# Altium PCB IMU.PcbDoc
Units mm, origin at the board's own origin, x right, y up, seen from the top; angles counter-clockwise.
Board outline 102.89 x 32.03 mm, 2 copper layers (Top Layer, Bottom Layer); 5 components, 20 nets, 80 pads, 25 vias.
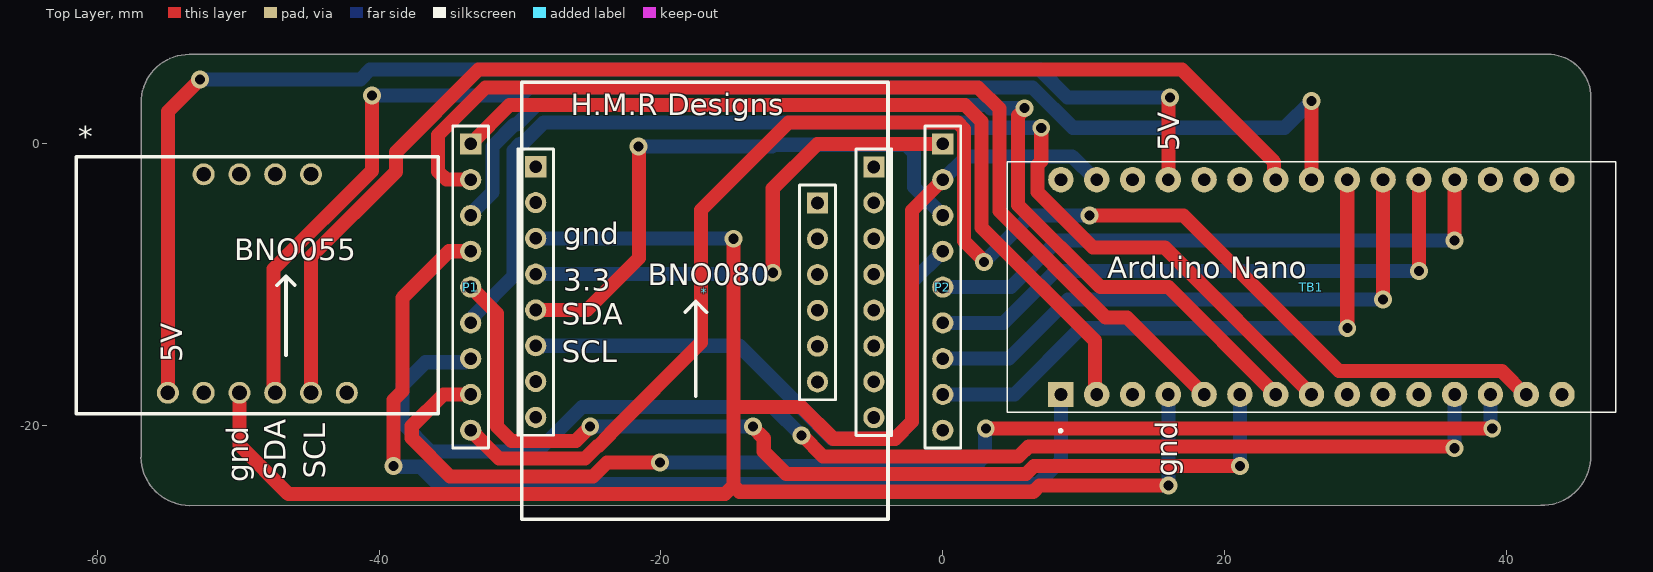
[diagram p0: Top Layer view]
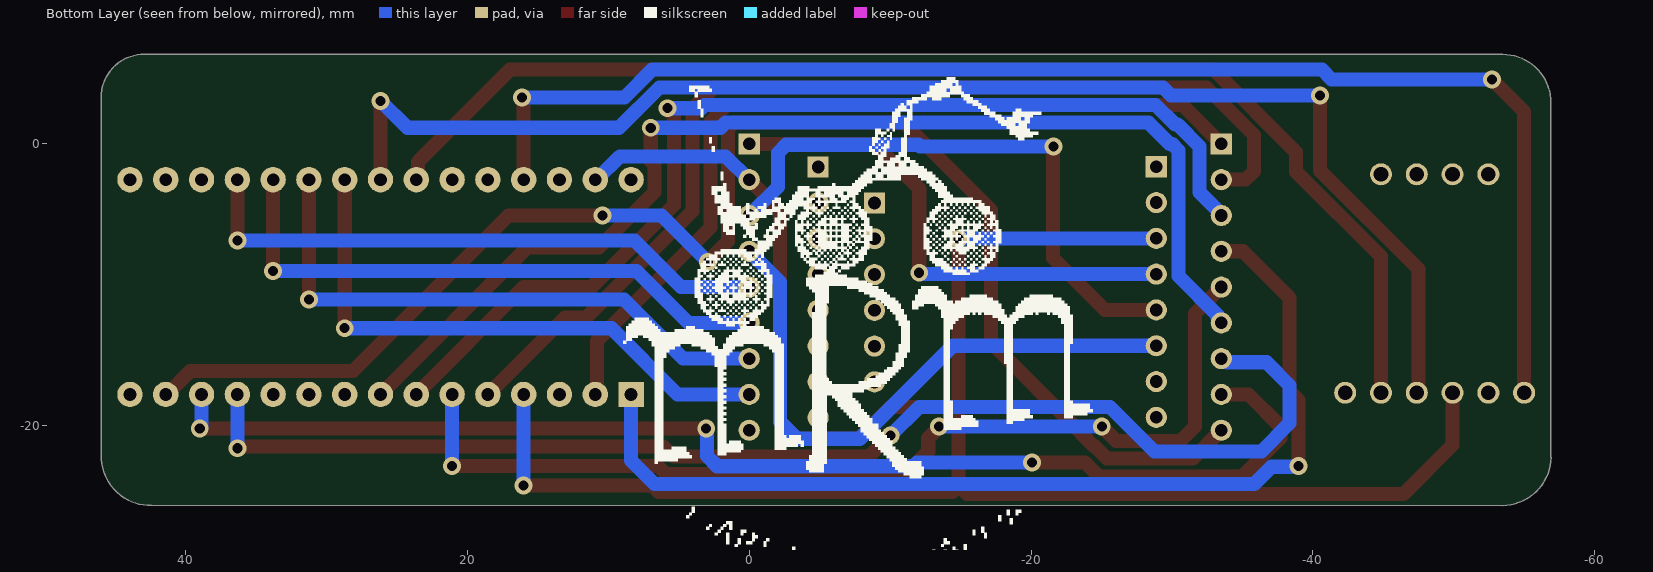
[diagram p1: Bottom Layer view, seen from below]

## Layer stack, top to bottom
Top Solder: solder mask 0.0102, Solder Resist, Dk 3.5
Top Layer: signal copper 0.0356
Dielectric 1: dielectric 0.32, FR-4, Dk 4.8
Bottom Layer: signal copper 0.0356
Bottom Solder: solder mask 0.0102, Solder Resist, Dk 3.5

## Board outline
-53.467,-25.668 cw(c-53.404,-22.162) -56.91,-22.225 -56.896,-22.225 -56.896,2.921 cw(c-53.467,2.921) -53.467,6.35 42.926,6.35 42.926,6.361 cw(c42.926,3.302) 45.985,3.302 45.974,3.302 45.974,-22.098 45.979,-22.098 cw(c42.481,-22.162) 42.416,-25.659 42.416,-25.654

## Design rules (kind name [scope] priority, off if disabled: settings)
Clearance [All] p1: gap=0.254 ignorepadtopadclearanceinfootprint=FALSE except(0: Arc-Hole Track-Hole SMDPad-Hole THPad-Hole Via-Hole Fill-Hole Poly-Hole Region-Hole Text-Hole)
PolygonConnect [All] p1: connectstyle=Relief reliefconductorwidth=0.254 reliefentries=4 polygonreliefangle="90 Angle" airgapwidth=0.254
RoutingVias [All] p1: holewidth=0.711 width=1.27 viastyle="Through Hole" minholewidth=0.711 minwidth=1.27 maxholewidth=0.711 maxwidth=1.27
SolderMaskExpansion [All] p1: expansion=0.102 istentingtop=FALSE
Width [All] p1: maxlimit=10 minlimit=0.254 preferedwidth=1 minimp=50.000000 maximp=50.000000 favimp=50.000000
30 further rules are at their usual default settings.

## Components (designator, comment, footprint, x,y, rotation, side; value= is the part's Value field where it differs from the comment)
* "bno" BNO -54.991,-17.659 r0 top
* "bno080" bno080 -8.89,-4.181 r180 top
P1 "Header 9" HDR1X9 -33.5,0 r270 top
P2 "Header 9" HDR1X9 0,0 r270 top
TB1 "ARDUINO_NANO" SHIELD_ARDUINO_NANO 26.162,-10.16 r90 top

## Footprints (in the part's own frame and the unit in brackets; to place one, negate y for a bottom-side part, rotate by r counter-clockwise, add the part's x,y. Pads: shape width x height; smd on the part's side, far side on the other; paste and mask are expansions set on the pad)
BNO [mm]
  round 1.56 hole 1.04: 6(5.08,15.5) 7(7.62,15.5) 8(10.16,15.5) 9(2.54,15.5) 10(5.08,0) 11(7.62,0) 12(0,0) 13(2.54,0) 14(10.16,0) 15(12.7,0)
  silkscreen extent -6.5,-1.5 19.2,16.75
bno080 [mm]
  round 1.5 hole 0.9: 1(-4,15.24) 2(-4,12.7) 3(-4,10.16) 4(-4,7.62) 5(-4,5.08) 6(-4,2.54) 7(-4,0) 9(0,12.71) 10(0,10.17) 11(0,7.63) 12(0,5.09) 13(0,2.55) 15(19.998,15.224) 16(19.998,12.684) 17(19.998,10.144) 18(19.998,7.604) 19(19.998,5.064) 20(19.998,2.524) 21(19.998,-0.016)
  rect 1.5x1.5 hole 0.9: 8(-4,-2.54) 14(0,0.01) 22(19.998,-2.556)
  silkscreen extent -5.27,-8.54 21.27,22.46
HDR1X9 [mm] "Connector; Header; 9 Position"
  rect 1.5x1.5 hole 0.9: 1(0,0)
  round 1.5 hole 0.9: 2(2.54,0) 3(5.08,0) 4(7.62,0) 5(10.16,0) 6(12.7,0) 7(15.24,0) 8(17.78,0) 9(20.32,0)
  silkscreen extent -1.27,-1.27 21.59,1.27
SHIELD_ARDUINO_NANO [mm]
  rect 1.8x1.8 / inner round 1.8 / far side rect 1.8x1.8 hole 0.9: 1(-7.62,17.78)
  round 1.8 hole 0.9: 2(-7.62,15.24) 3(-7.62,12.7) 4(-7.62,10.16) 5(-7.62,7.62) 6(-7.62,5.08) 7(-7.62,2.54) 8(-7.62,0) 9(-7.62,-2.54) 10(-7.62,-5.08) 11(-7.62,-7.62) 12(-7.62,-10.16) 13(-7.62,-12.7) 14(-7.62,-15.24) 15(-7.62,-17.78) 16(7.62,-17.78) 17(7.62,-15.24) 18(7.62,-12.7) 19(7.62,-10.16) 20(7.62,-7.62) 21(7.62,-5.08) 22(7.62,-2.54) 23(7.62,0) 24(7.62,2.54) 25(7.62,5.08) 26(7.62,7.62) 27(7.62,10.16) 28(7.62,12.7) 29(7.62,15.24) 30(7.62,17.78)
  silkscreen extent -10.3,-21.59 8.89,21.59, body extent -9,-21.6 9,23.4, height 12.6

## Part data
P1 P2: "Header, 9-Pin", LatestRevisionDate=17-Jul-2002, LatestRevisionNote="Re-released for DXP Platform.", Publisher="Altium Limited"
TB1: "Small, complete, and breadboard-friendly board based on the ATmega328 (Arduino Nano 3.x)", Package="Non-Standard Arduino", Availability="Not in stock", Check_prices=https://www.snapeda.com/parts/Arduino%20Nano/Arduino/view-part/?ref=eda, MF=Arduino, MP="Arduino Nano", Price=None, SnapEDA_Link=https://www.snapeda.com/parts/Arduino%20Nano/Arduino/view-part/?ref=snap

## Via types
v1: diameter 1.27, hole 0.711, Top Layer to Bottom Layer, 25 vias

## Nets (pads, with @x,y where several pads share a name; then routed paths per layer and width w, separated by ;. In a path a pad name is that pad's centre, name@x,y a point inside that pad or via, vN(x,y) a via of type N, cw(c..) or ccw(c..) an arc to the next point about the centre after c; other vN are vias at no path point)
Net*_10: *.10@-49.911,-17.659 *.20 P2.2 TB1.4 TB1.29 | length 153.7
  Top Layer w1: *.10@-49.911,-18.406 -49.911,-21.377 -46.444,-24.844 -15.454,-24.844 -14.859,-24.249 ; v1(-14.859,-6.731) -14.859,-18.669 ; P2.2@-0.096,-2.444 P2.2 -2.181,-4.721 -2.181,-19.707 -3.399,-20.925 -7.777,-20.925 -10.033,-18.669 -14.859,-18.669 ; v1(16.002,-24.249) 6.857,-24.249 6.419,-24.687 -14.421,-24.687 -14.859,-24.249 ; -14.859,-24.249 -14.859,-18.669
  Bottom Layer w1: *.20 -28.875,-6.718 -14.872,-6.718 v1(-14.859,-6.731) ; P2.2@-0.135,-2.54 P2.2 0.026,-2.54 1.68,-0.886 9.182,-0.886 10.836,-2.54 TB1.29 ; v1(16.002,-24.249) TB1.4
Net*_11: *.11@-47.371,-17.659 TB1.23 | length 98.2
  Top Layer w1: *.11@-47.497,-17.419 -47.478,-17.4 -47.478,-17.156 -47.498,-17.136 -47.498,-8.89 -40.513,-1.905 v1(-40.513,3.429) ; TB1.23 v1(26.162,3.048)
  Bottom Layer w1: v1(-40.513,3.429) -29.942,3.429 -29.359,4.012 6.358,4.012 9.227,1.143 24.257,1.143 v1(26.162,3.048)
Net*_12: *.12@-54.991,-17.659 TB1.27 | length 98.8
  Top Layer w1: *.12@-54.991,-17.499 -54.991,2.286 v1(-52.705,4.572) ; TB1.27 16.002,3.102 16.129,3.229 v1(16.129,3.302)
  Bottom Layer w1: v1(-52.705,4.572) -41.334,4.572 -40.64,5.266 6.878,5.266 8.842,3.302 v1(16.129,3.302)
Net*_14: *.14@-44.831,-17.659 TB1.24 | length 88.4
  Top Layer w1: *.14@-44.831,-17.699 -44.831,-7.996 -38.813,-1.979 -38.813,-0.591 -32.956,5.266 16.959,5.266 23.496,-1.271 23.496,-2.414 TB1.24
Net*_17: *.17 P2.4 | length 42.9
  Bottom Layer w1: *.17 -14.445,-14.325 -7.845,-20.925 -3.399,-20.925 -2.181,-19.707 -2.181,-9.801 P2.4
Net*_18: *.18 P2.3 | length 41.9
  Top Layer w1: *.18 -25.247,-11.785 -21.551,-8.089 -21.551,-0.237 v1(-21.59,-0.198)
  Bottom Layer w1: v1(-21.59,-0.198) -12.135,-0.198 -12,-0.063 -2.618,-0.063 -2.032,-0.649 -2.032,-3.048 P2.3
Net*_19: *.19 P2.1 | length 36.2
  Top Layer w1: v1(-12.065,-9.144) -12.065,-3.175 -8.89,0 P2.1
  Bottom Layer w1: *.19 -12.239,-9.245 -12.138,-9.144 v1(-12.065,-9.144)
NetP1_1: P1.1 TB1.2 | length 60.6
  Top Layer w1: P1.1 -30.742,2.758 1.582,2.758 2.758,1.582 2.758,-5.933 10.796,-13.971 10.796,-17.654 TB1.2
NetP1_2: P1.2 TB1.5 | length 74.2
  Top Layer w1: P1.2 -35.228,-2.54 -35.814,-1.954 -35.814,0.635 -32.437,4.012 2.51,4.012 4.012,2.51 4.012,-4.769 11.562,-12.319 13.081,-12.319 TB1.5
NetP1_3: P1.3 TB1.7 | length 75.5
  Top Layer w1: v1(5.801,2.532) 5.801,2.459 5.342,2 5.342,-4.326 11.176,-10.16 16.002,-10.16 TB1.7
  Bottom Layer w1: P1.3 -33.5,-4.972 -31.963,-3.435 -31.963,-0.191 -30.407,1.365 -30.233,1.365 -28.839,2.758 3.166,2.758 3.392,2.532 v1(5.801,2.532)
NetP1_4: P1.4 TB1.1 | length 71.7
  Top Layer w1: v1(-38.989,-22.86) -38.989,-18.177 -38.354,-17.542 -38.354,-10.922 -35.052,-7.62 P1.4
  Bottom Layer w1: v1(-38.989,-22.86) -38.937,-22.912 -37.057,-22.912 -35.839,-24.13 6.731,-24.13 8.382,-22.479 TB1.1
NetP1_5: P1.5 TB1.6 | length 71.7
  Top Layer w1: P1.5 -31.623,-12.037 -31.623,-20.066 -30.607,-21.082 -26.043,-21.082 v1(-25.019,-20.058) ; v1(-13.462,-20.058) -13.462,-20.131 -12.703,-20.89 -12.703,-21.841 -11.111,-23.433 5.899,-23.433 6.472,-22.86 v1(21.082,-22.86)
  Bottom Layer w1: P1.5@-33.575,-10.235 P1.5 ; v1(-25.019,-20.058) v1(-13.462,-20.058) ; v1(21.082,-22.86) TB1.6
NetP1_6: P1.6 TB1.8 | length 82
  Top Layer w1: v1(6.985,1.143) 6.985,-1.222 6.715,-1.492 6.715,-3.413 10.668,-7.366 15.748,-7.366 TB1.8
  Bottom Layer w1: P1.6 -33.5,-12.565 -33.25,-12.315 -33.25,-12.168 -30.46,-9.378 -30.46,-4.92 -30.46,-0.462 -30.018,-0.02 -29.844,-0.02 -28.32,1.504 1.671,1.504 2.032,1.143 v1(6.985,1.143)
NetP1_7: P1.7 TB1.12 | length 90.8
  Top Layer w1: v1(-10.033,-20.701) -9.97,-20.701 -8.492,-22.179 5.38,-22.179 6.096,-21.463 36.114,-21.463 36.249,-21.598 v1(36.322,-21.598)
  Bottom Layer w1: P1.7 -33.635,-15.24 -33.889,-15.494 -36.703,-15.494 -38.354,-17.145 -38.354,-19.812 -36.342,-21.824 -28.749,-21.824 -25.594,-18.669 -12.065,-18.669 v1(-10.033,-20.701) ; v1(36.322,-21.598) TB1.12
NetP1_8: P1.8 TB1.13 | length 89
  Top Layer w1: P1.8 -35.433,-17.78 -37.686,-20.033 -37.686,-20.861 -34.957,-23.59 -24.813,-23.59 -23.829,-22.606 v1(-20.066,-22.606) ; v1(3.048,-20.193) 3.064,-20.209 v1@38.973,-20.209
  Bottom Layer w1: v1(-20.066,-22.606) -11.917,-22.606 -11.647,-22.876 2.27,-22.876 2.996,-22.15 2.996,-20.245 v1(3.048,-20.193) ; TB1.13 38.862,-19.993 38.989,-20.12 v1(38.989,-20.193)
NetP1_9: P1.9 TB1.14 | length 106.6
  Top Layer w1: P1.9 -31.484,-22.336 -25.384,-22.336 -24.495,-21.447 -24.444,-21.447 -23.63,-20.633 -23.63,-20.582 -17.145,-14.097 -17.145,-4.699 -10.942,1.504 1.062,1.504 1.504,1.062 1.504,-6.892 2.921,-8.309 v1(2.921,-8.382) ; v1(10.414,-5.08) 17.081,-5.08 28.127,-16.126 39.662,-16.126 41.316,-17.78 TB1.14
  Bottom Layer w1: v1(2.921,-8.382) 6.223,-5.08 v1(10.414,-5.08)
NetP2_5: P2.5 TB1.19 | length 42
  Top Layer w1: v1(36.322,-6.858) TB1.19
  Bottom Layer w1: P2.5 4.826,-10.16 8.128,-6.858 v1(36.322,-6.858)
NetP2_6: P2.6 TB1.20 | length 41.8
  Top Layer w1: v1(33.782,-9.017) TB1.20
  Bottom Layer w1: P2.6 4.318,-12.7 8.001,-9.017 v1(33.782,-9.017)
NetP2_7: P2.7 TB1.21 | length 41.5
  Top Layer w1: v1(31.242,-11.049) TB1.21
  Bottom Layer w1: P2.7 4.699,-15.24 8.89,-11.049 v1(31.242,-11.049)
NetP2_8: P2.8 TB1.22 | length 41.4
  Top Layer w1: v1(28.702,-13.081) TB1.22
  Bottom Layer w1: P2.8@-0.192,-17.78 5.08,-17.78 9.779,-13.081 v1(28.702,-13.081)
pads on no net: *.1 *.2 *.3 *.4 *.5 *.6 *.7 *.8 *.9 *.10@-8.89,-14.351 *.11@-8.89,-11.811 *.12@-8.89,-9.271 *.13 *.14@-8.89,-4.191 *.15 *.16 *.21 *.22 P2.9 TB1.3 TB1.9 TB1.10 TB1.11 TB1.15 TB1.16 TB1.17 TB1.18 TB1.25 TB1.26 TB1.28 TB1.30

## Silkscreen, mask and mechanical layers (free items; w line width, h text height)
Top Overlay:
  lines w0.254: -47.244,-10.033 -46.609,-9.398 ; -46.609,-14.986 -46.609,-9.398 ; -45.974,-10.033 -46.609,-9.398 ; -18.288,-11.938 -17.526,-11.176 ; -17.526,-17.907 -17.526,-11.176 ; -16.764,-11.938 -17.526,-11.176
  text "H.M.R Designs" at -26.416,2.032 h1.52
  text "5V" at 16.764,-0.508 h1.52 r90
  text "gnd" at -26.924,-7.112 h1.52
  text "BNO055" at -50.292,-8.255 h1.52
  text "Arduino Nano" at 11.684,-9.525 h1.52
  text "BNO080" at -20.955,-10.033 h1.52
  text "3.3" at -26.924,-10.414 h1.52
  text "SDA" at -27.051,-12.827 h1.52
  text "5V" at -53.975,-15.494 h1.52 r90
  text "SCL" at -27.051,-15.494 h1.52
  text "gnd" at 16.637,-23.622 h1.52 r90
  text "SCL" at -43.815,-23.749 h1.52 r90
  text "SDA" at -46.609,-23.876 h1.52 r90
  text "gnd" at -49.276,-24.003 h1.52 r90
Bottom Overlay:
  drawing of 40 lines, arcs and shapes, not listed
Mechanical 15:
  lines w0.254: -56.91,-22.225 ccw(c-53.404,-22.162) -53.467,-25.668 ; -56.896,-22.225 -56.896,2.921 cw(c-53.467,2.921) -53.467,6.35 42.926,6.35 ; -53.467,-25.654 42.416,-25.654 ; 42.416,-25.659 ccw(c42.481,-22.162) 45.979,-22.098 ; 42.926,6.361 cw(c42.926,3.302) 45.985,3.302 ; 45.974,-22.098 45.974,3.302